# EAGLE board 27CXXXDouble (EAGLE 6.6.0)
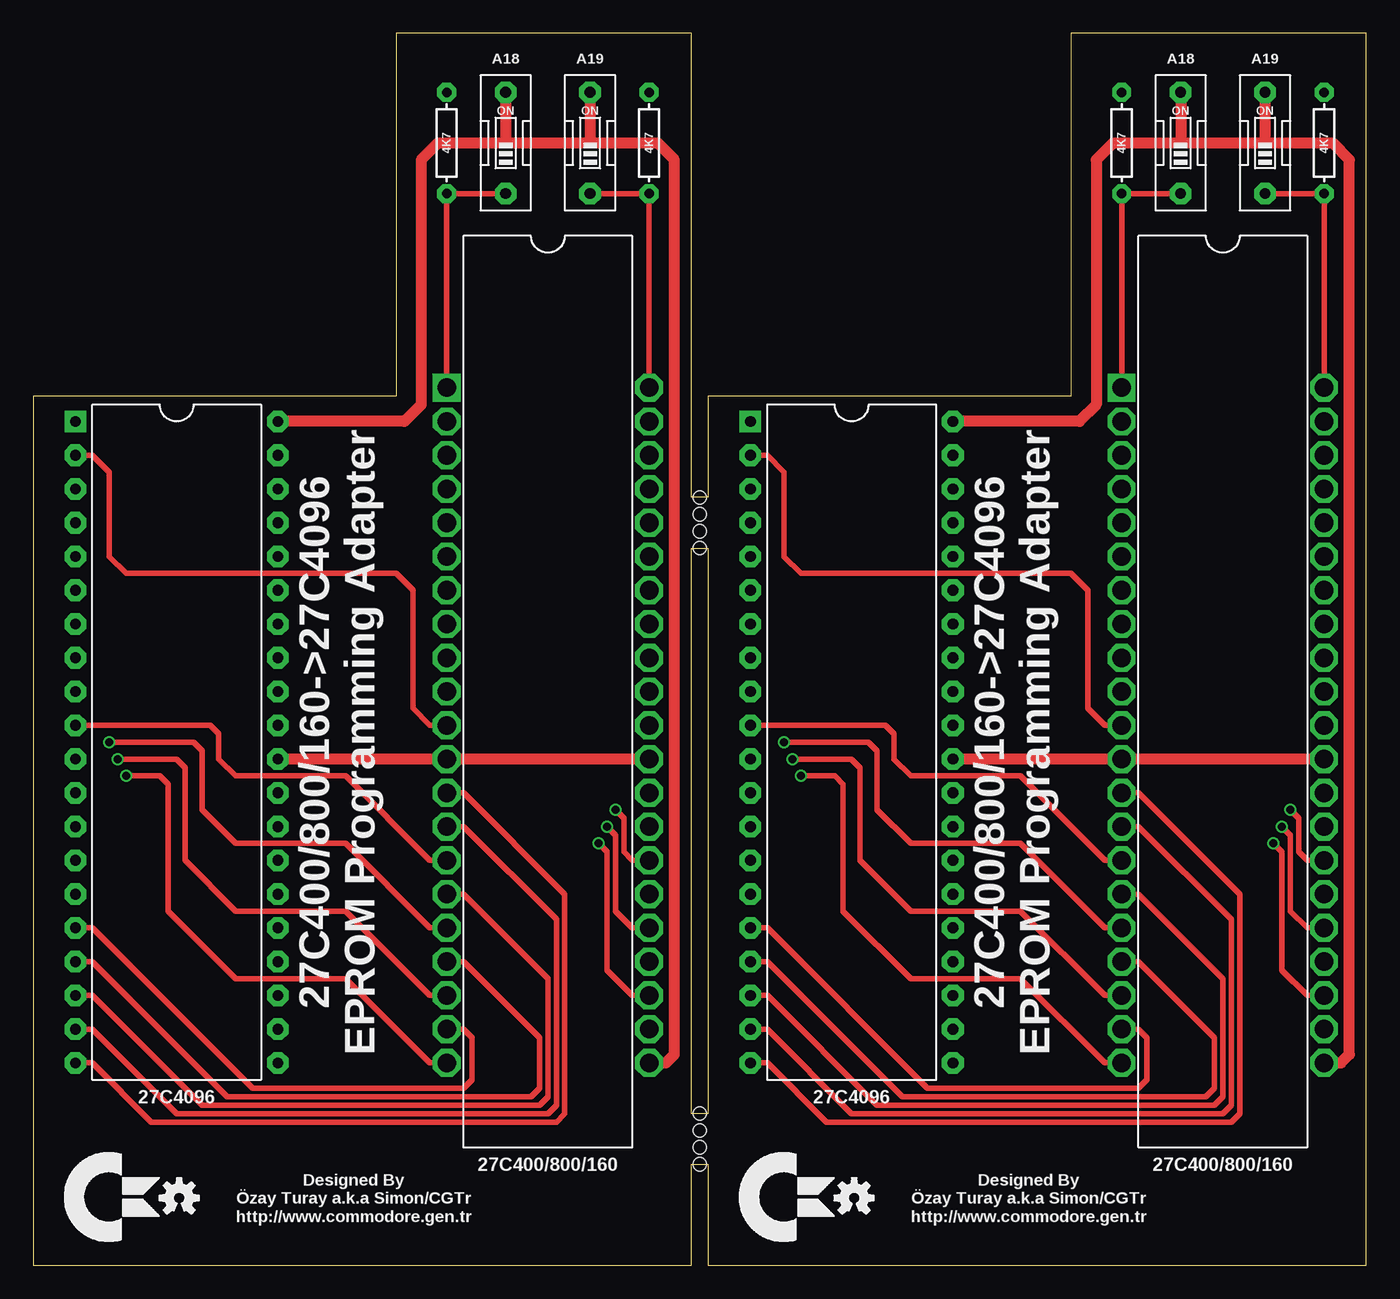
[diagram p0: board, top side]
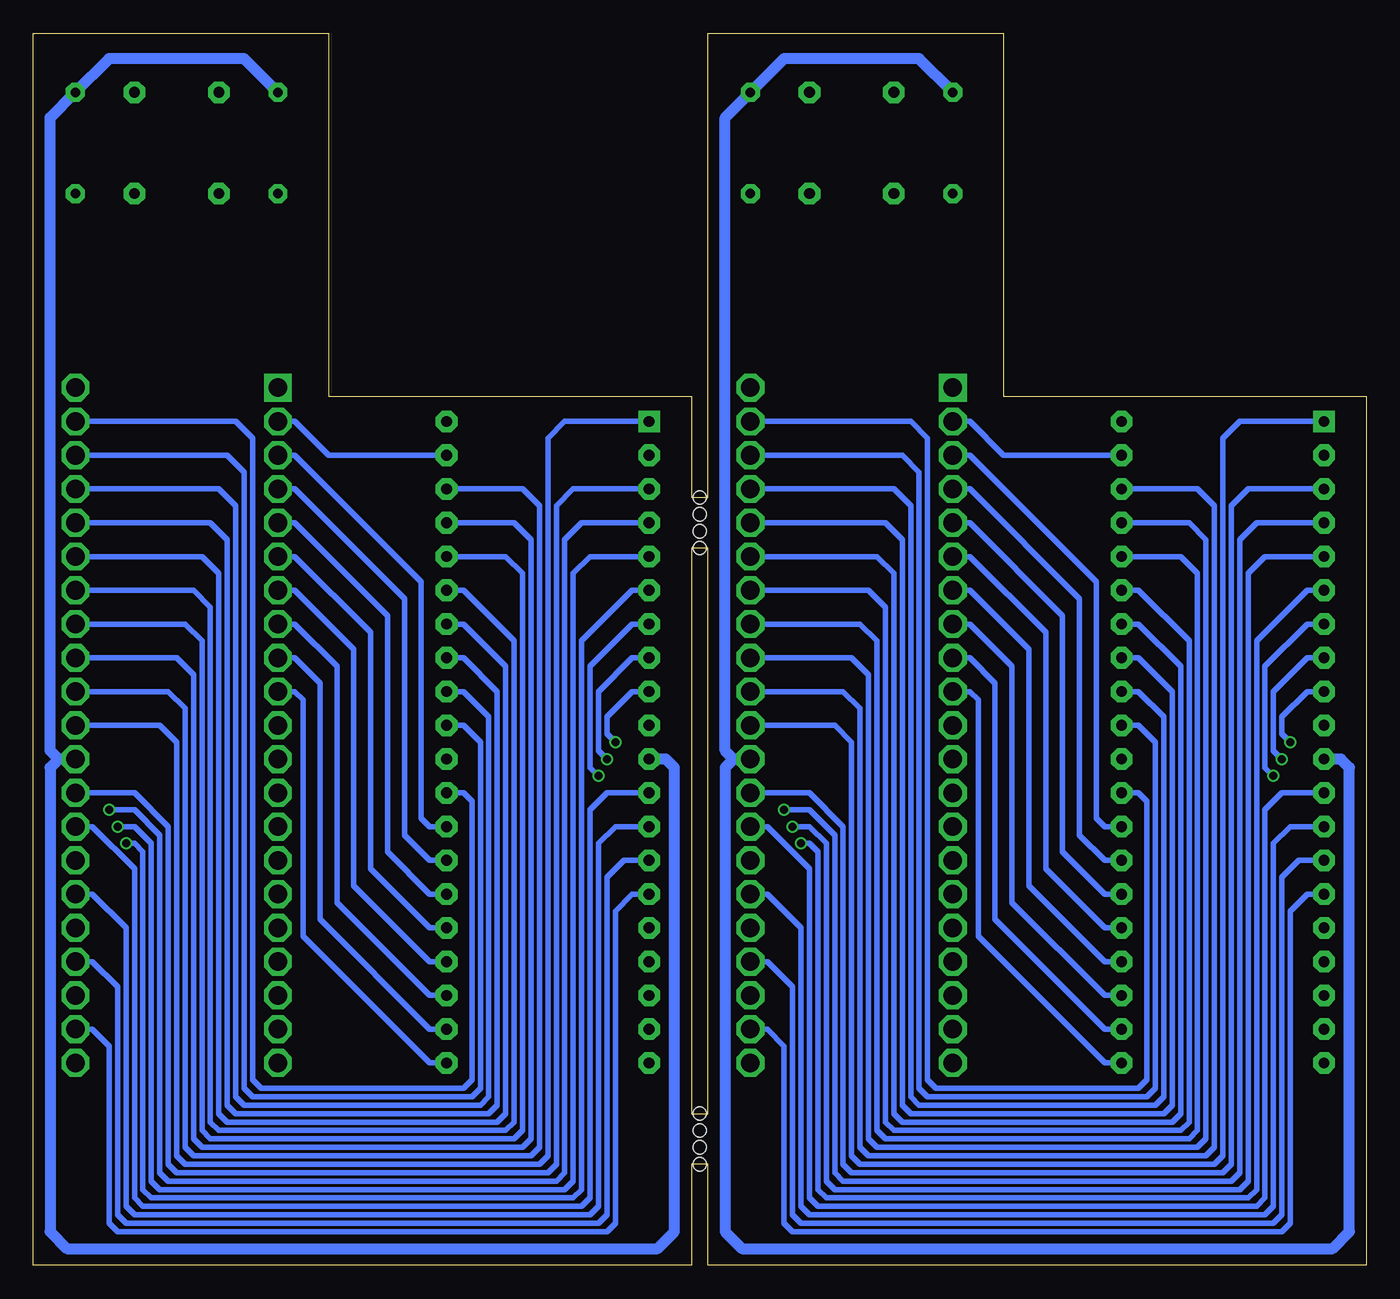
[diagram p1: board, bottom side, seen from below]

Size 100.33 x 92.71 mm. Coordinates in mm from the lower left corner, seen from the top.
Outline: 0,0 49.53,0 49.53,7.62 50.8,7.62 50.8,0 100.33,0 100.33,92.71 78.11,92.71 78.11,65.41 50.8,65.41 50.8,57.78 49.53,57.78 49.53,92.71 27.3,92.71 27.3,65.41 0,65.41 0,0
Outline: 50.8,11.43 49.53,11.43 49.53,53.98 50.8,53.98 50.8,11.43
Copper layers (1*16): Top 0.035mm / dielectric 1.5mm / Bottom 0.035mm
Design rules "DirtyPCBs": minimum track width 5mil, minimum drill 12mil, track to track 5mil, track to pad 5mil, pad to pad 5mil, via to via 5mil, smd to smd 0mil, copper to edge 10mil, drill to drill 10mil, minimum pad ring 10mil, minimum via ring 6mil, stop-mask expansion 2mil, vias tented up to drill 25mil, thermal gap 10mil
Holes 1.02 mm at 50.16,57.78 50.16,56.52 50.16,55.24 50.16,53.98 50.16,11.43 50.16,10.16 50.16,8.89 50.16,7.62

## Footprints (pad centres in the part's own frame; a part is rotated, then mirrored left to right if it is on the bottom)
DIP40W = drill 0.813 pad 1.626 square: 1 -24.13,-7.62 | drill 0.813 pad 1.626 octagon: 2 -21.59,-7.62; 3 -19.05,-7.62; 4 -16.51,-7.62; 5 -13.97,-7.62; 6 -11.43,-7.62; 7 -8.89,-7.62; 8 -6.35,-7.62; 9 -3.81,-7.62; 10 -1.27,-7.62; 11 1.27,-7.62; 12 3.81,-7.62; 13 6.35,-7.62; 14 8.89,-7.62; 15 11.43,-7.62; 16 13.97,-7.62; 17 16.51,-7.62; 18 19.05,-7.62; 19 21.59,-7.62; 20 24.13,-7.62; 21 24.13,7.62; 22 21.59,7.62; 23 19.05,7.62; 24 16.51,7.62; 25 13.97,7.62; 26 11.43,7.62; 27 8.89,7.62; 28 6.35,7.62; 29 3.81,7.62; 30 1.27,7.62; 31 -1.27,7.62; 32 -3.81,7.62; 33 -6.35,7.62; 34 -8.89,7.62; 35 -11.43,7.62; 36 -13.97,7.62; 37 -16.51,7.62; 38 -19.05,7.62; 39 -21.59,7.62; 40 -24.13,7.62
ZIF42 = drill 1.397 pad 2.032 square: 1 -25.4,-7.62 | drill 1.397 pad 2.032 octagon: 2 -22.86,-7.62; 3 -20.32,-7.62; 4 -17.78,-7.62; 5 -15.24,-7.62; 6 -12.7,-7.62; 7 -10.16,-7.62; 8 -7.62,-7.62; 9 -5.08,-7.62; 10 -2.54,-7.62; 11 0,-7.62; 12 2.54,-7.62; 13 5.08,-7.62; 14 7.62,-7.62; 15 10.16,-7.62; 16 12.7,-7.62; 17 15.24,-7.62; 18 17.78,-7.62; 19 20.32,-7.62; 20 22.86,-7.62; 21 25.4,-7.62; 22 25.4,7.62; 23 22.86,7.62; 24 20.32,7.62; 25 17.78,7.62; 26 15.24,7.62; 27 12.7,7.62; 28 10.16,7.62; 29 7.62,7.62; 30 5.08,7.62; 31 2.54,7.62; 32 0,7.62; 33 -2.54,7.62; 34 -5.08,7.62; 35 -7.62,7.62; 36 -10.16,7.62; 37 -12.7,7.62; 38 -15.24,7.62; 39 -17.78,7.62; 40 -20.32,7.62; 41 -22.86,7.62; 42 -25.4,7.62
RESISTOR_0.3 = drill 0.711 pad 1.422 octagon: 1 -3.81,0; 2 3.81,0
SWITCH_DIP_01 = drill 0.813 pad 1.626 octagon: 1 0,-3.81; 2 0,3.81

## Placement (x,y rotation side)
IC1  27C4096  [DIP40W]  10.79,39.37 270 top
IC2  27C400/800/160  [ZIF42]  38.73,40.64 270 top
IC3  27C4096  [DIP40W]  61.59,39.37 270 top
IC4  27C400/800/160  [ZIF42]  89.53,40.64 270 top
LOGO1  OSHW_LOGO_SMALL  [OSHW_LOGO_SMALL]  10.99,5.08 0 top
LOGO2  OSHW_LOGO_SMALL  [OSHW_LOGO_SMALL]  61.79,5.08 0 top
R1  4K7  [RESISTOR_0.3]  31.11,84.45 90 top
R2  4K7  [RESISTOR_0.3]  46.35,84.45 90 top
R3  4K7  [RESISTOR_0.3]  81.92,84.45 90 top
R4  4K7  [RESISTOR_0.3]  97.16,84.45 90 top
SW1  A18  [SWITCH_DIP_01]  35.56,84.45 0 top
SW2  A19  [SWITCH_DIP_01]  41.91,84.45 0 top
SW3  A18  [SWITCH_DIP_01]  86.36,84.45 0 top
SW4  A19  [SWITCH_DIP_01]  92.71,84.45 0 top

## Library data of the parts
IC1-IC4 = sj_ic
LOGO1 LOGO2 R1-R4 SW1-SW4 = sj_standart

## Nets
!CE: IC1.2 IC2.11
!CE1: IC3.2 IC4.11
!OE: IC1.20 IC2.13
!OE1: IC3.20 IC4.13
A0: IC1.21 IC2.10
A1: IC1.22 IC2.9
A2: IC1.23 IC2.8
A3: IC1.24 IC2.7
A4: IC1.25 IC2.6
A5: IC1.26 IC2.5
A6: IC1.27 IC2.4
A7: IC1.28 IC2.3
A8: IC1.29 IC2.41
A9: IC1.31 IC2.40
A10: IC1.32 IC2.39
A11: IC1.33 IC2.38
A12: IC1.34 IC2.37
A13: IC1.35 IC2.36
A14: IC1.36 IC2.35
A15: IC1.37 IC2.34
A16: IC1.38 IC2.33
A17: IC1.39 IC2.2
A18: IC2.1 R1.1 SW1.1
A19: IC2.42 R2.1 SW2.1
A20: IC3.21 IC4.10
A21: IC3.22 IC4.9
A22: IC3.23 IC4.8
A23: IC3.24 IC4.7
A24: IC3.25 IC4.6
A25: IC3.26 IC4.5
A26: IC3.27 IC4.4
A27: IC3.28 IC4.3
A28: IC3.29 IC4.41
A29: IC3.31 IC4.40
A30: IC3.32 IC4.39
A31: IC3.36 IC4.35
A32: IC3.33 IC4.38
A33: IC3.34 IC4.37
A34: IC3.37 IC4.34
A35: IC3.35 IC4.36
A36: IC3.38 IC4.33
A37: IC3.39 IC4.2
A38: IC4.1 R3.1 SW3.1
A39: IC4.42 R4.1 SW4.1
GND: IC1.11 IC1.30 IC2.12 IC2.31 R1.2 R2.2
GND1: IC3.11 IC3.30 IC4.12 IC4.31 R3.2 R4.2
Q0: IC1.19 IC2.14
Q1: IC1.18 IC2.16
Q2: IC1.17 IC2.18
Q3: IC1.16 IC2.20
Q4: IC1.15 IC2.23
Q5: IC1.14 IC2.25
Q6: IC1.13 IC2.27
Q7: IC1.12 IC2.29
Q8: IC1.10 IC2.15
Q9: IC1.9 IC2.17
Q10: IC1.8 IC2.19
Q11: IC1.7 IC2.21
Q12: IC1.6 IC2.24
Q13: IC1.5 IC2.26
Q14: IC1.4 IC2.28
Q15: IC1.3 IC2.30
Q16: IC3.19 IC4.14
Q17: IC3.18 IC4.16
Q18: IC3.17 IC4.18
Q19: IC3.16 IC4.20
Q20: IC3.15 IC4.23
Q21: IC3.14 IC4.25
Q22: IC3.13 IC4.27
Q23: IC3.12 IC4.29
Q24: IC3.10 IC4.15
Q25: IC3.9 IC4.17
Q26: IC3.8 IC4.19
Q27: IC3.7 IC4.21
Q28: IC3.6 IC4.24
Q29: IC3.5 IC4.26
Q30: IC3.4 IC4.28
Q31: IC3.3 IC4.30
VCC: IC1.40 IC2.22 SW1.2 SW2.2
VCC1: IC3.40 IC4.22 SW3.2 SW4.2
VPP: IC1.1 IC2.32
VPP1: IC3.1 IC4.32

## Tracks (layer width: path | path; a pad name or v marks a point on that pad's centre or on a via)
!CE
  Top 0.406: IC1.2 4.45,60.96 5.71,59.69 5.71,53.34 6.99,52.07 27.3,52.07 28.57,50.8 28.57,41.91 29.84,40.64 IC2.11
!CE1
  Top 0.406: IC3.2 55.24,60.96 56.52,59.69 56.52,53.34 57.78,52.07 78.11,52.07 79.38,50.8 79.38,41.91 80.64,40.64 IC4.11
!OE
  Top 0.406: IC1.20 4.45,15.24 8.89,10.79 39.37,10.79 40.01,11.43 40.01,27.94 32.38,35.56 IC2.13
!OE1
  Top 0.406: IC3.20 55.24,15.24 59.69,10.79 90.17,10.79 90.81,11.43 90.81,27.94 83.19,35.56 IC4.13
A0
  Bottom 0.406: IC1.21 19.68,15.24 29.21,24.77 29.21,42.55 29.84,43.18 IC2.10
A1
  Bottom 0.406: IC1.22 19.68,17.78 27.94,26.04 27.94,43.81 29.84,45.72 IC2.9
A2
  Bottom 0.406: IC1.23 19.68,20.32 26.67,27.3 26.67,45.09 29.84,48.26 IC2.8
A3
  Bottom 0.406: IC1.24 19.68,22.86 25.4,28.57 25.4,46.35 29.84,50.8 IC2.7
A4
  Bottom 0.406: IC1.25 19.68,25.4 24.13,29.84 24.13,47.62 29.84,53.34 IC2.6
A5
  Bottom 0.406: IC1.26 19.68,27.94 22.86,31.11 22.86,48.9 29.84,55.88 IC2.5
A6
  Bottom 0.406: IC1.27 19.68,30.48 21.59,32.38 21.59,50.16 29.84,58.42 IC2.4
A7
  Bottom 0.406: IC1.28 19.68,33.02 20.32,33.66 20.32,51.44 29.84,60.96 IC2.3
A8
  Bottom 0.406: IC1.29 17.14,35.56 16.51,34.92 16.51,13.97 17.14,13.34 32.38,13.34 33.02,13.97 33.02,62.23 34.29,63.5 IC2.41
A9
  Bottom 0.406: IC1.31 17.14,40.64 15.88,39.37 15.88,13.34 16.51,12.7 33.02,12.7 33.66,13.34 33.66,59.69 34.92,60.96 IC2.40
A10
  Bottom 0.406: IC1.32 17.14,43.18 15.24,41.27 15.24,12.7 15.88,12.06 33.66,12.06 34.29,12.7 34.29,57.15 35.56,58.42 IC2.39
A11
  Bottom 0.406: IC1.33 17.14,45.72 14.61,43.18 14.61,12.06 15.24,11.43 34.29,11.43 34.92,12.06 34.92,54.61 36.2,55.88 IC2.38
A12
  Bottom 0.406: IC1.34 17.14,48.26 13.97,45.09 13.97,11.43 14.61,10.79 34.92,10.79 35.56,11.43 35.56,52.07 36.83,53.34 IC2.37
A13
  Bottom 0.406: IC1.35 17.14,50.8 13.34,46.99 13.34,10.79 13.97,10.16 35.56,10.16 36.2,10.79 36.2,49.53 37.47,50.8 IC2.36
A14
  Bottom 0.406: IC1.36 13.97,53.34 12.7,52.07 12.7,10.16 13.34,9.53 36.2,9.53 36.83,10.16 36.83,46.99 38.1,48.26 IC2.35
A15
  Bottom 0.406: IC1.37 13.34,55.88 12.06,54.61 12.06,9.53 12.7,8.89 36.83,8.89 37.47,9.53 37.47,44.45 38.73,45.72 IC2.34
A16
  Bottom 0.406: IC1.38 12.7,58.42 11.43,57.15 11.43,8.89 12.06,8.26 37.47,8.26 38.1,8.89 38.1,41.91 39.37,43.18 IC2.33
A17
  Bottom 0.406: IC1.39 27.3,60.96 29.84,63.5 IC2.2
A18
  Top 0.406: SW1.1 R1.1 IC2.1
A19
  Top 0.406: SW2.1 R2.1 IC2.42
A20
  Bottom 0.406: IC3.21 70.48,15.24 80.01,24.77 80.01,42.55 80.64,43.18 IC4.10
A21
  Bottom 0.406: IC3.22 70.48,17.78 78.74,26.04 78.74,43.81 80.64,45.72 IC4.9
A22
  Bottom 0.406: IC3.23 70.48,20.32 77.47,27.3 77.47,45.09 80.64,48.26 IC4.8
A23
  Bottom 0.406: IC3.24 70.48,22.86 76.2,28.57 76.2,46.35 80.64,50.8 IC4.7
A24
  Bottom 0.406: IC3.25 70.48,25.4 74.93,29.84 74.93,47.62 80.64,53.34 IC4.6
A25
  Bottom 0.406: IC3.26 70.48,27.94 73.66,31.11 73.66,48.9 80.64,55.88 IC4.5
A26
  Bottom 0.406: IC3.27 70.48,30.48 72.39,32.38 72.39,50.16 80.64,58.42 IC4.4
A27
  Bottom 0.406: IC3.28 70.48,33.02 71.12,33.66 71.12,51.44 80.64,60.96 IC4.3
A28
  Bottom 0.406: IC3.29 67.94,35.56 67.31,34.92 67.31,13.97 67.94,13.34 83.19,13.34 83.82,13.97 83.82,62.23 85.09,63.5 IC4.41
A29
  Bottom 0.406: IC3.31 67.94,40.64 66.67,39.37 66.67,13.34 67.31,12.7 83.82,12.7 84.45,13.34 84.45,59.69 85.72,60.96 IC4.40
A30
  Bottom 0.406: IC3.32 67.94,43.18 66.04,41.27 66.04,12.7 66.67,12.06 84.45,12.06 85.09,12.7 85.09,57.15 86.36,58.42 IC4.39
A31
  Bottom 0.406: IC3.36 64.77,53.34 63.5,52.07 63.5,10.16 64.14,9.53 87,9.53 87.63,10.16 87.63,46.99 88.9,48.26 IC4.35
A32
  Bottom 0.406: IC3.33 67.94,45.72 65.41,43.18 65.41,12.06 66.04,11.43 85.09,11.43 85.72,12.06 85.72,54.61 87,55.88 IC4.38
A33
  Bottom 0.406: IC3.34 67.94,48.26 64.77,45.09 64.77,11.43 65.41,10.79 85.72,10.79 86.36,11.43 86.36,52.07 87.63,53.34 IC4.37
A34
  Bottom 0.406: IC3.37 64.14,55.88 62.87,54.61 62.87,9.53 63.5,8.89 87.63,8.89 88.27,9.53 88.27,44.45 89.53,45.72 IC4.34
A35
  Bottom 0.406: IC3.35 67.94,50.8 64.14,46.99 64.14,10.79 64.77,10.16 86.36,10.16 87,10.79 87,49.53 88.27,50.8 IC4.36
A36
  Bottom 0.406: IC3.38 63.5,58.42 62.23,57.15 62.23,8.89 62.87,8.26 88.27,8.26 88.9,8.89 88.9,41.91 90.17,43.18 IC4.33
A37
  Bottom 0.406: IC3.39 78.11,60.96 80.64,63.5 IC4.2
A38
  Top 0.406: SW3.1 R3.1 IC4.1
A39
  Top 0.406: SW4.1 R4.1 IC4.42
GND
  Top 0.813: IC2.31 IC2.12 IC1.30
  Bottom 0.813: 47.62,38.1 48.26,38.73 48.26,86.36 R2.2 43.81,90.81 33.66,90.81 R1.2 | IC2.31 47.62,38.1 | 47.62,38.1 48.26,37.47 48.26,2.54 46.99,1.27 2.54,1.27 1.27,2.54 1.27,37.47 1.91,38.1 IC1.11
GND1
  Top 0.813: IC4.31 IC4.12 IC3.30
  Bottom 0.813: 98.42,38.1 99.06,38.73 99.06,86.36 R4.2 94.61,90.81 84.45,90.81 R3.2 | IC4.31 98.42,38.1 | 98.42,38.1 99.06,37.47 99.06,2.54 97.79,1.27 53.34,1.27 52.07,2.54 52.07,37.47 52.7,38.1 IC3.11
Q0
  Top 0.406: IC1.19 4.45,17.78 10.79,11.43 38.73,11.43 39.37,12.06 39.37,26.04 32.38,33.02 IC2.14
Q1
  Top 0.406: IC1.18 4.45,20.32 12.7,12.06 38.1,12.06 38.73,12.7 38.73,21.59 32.38,27.94 IC2.16
Q2
  Top 0.406: IC1.17 4.45,22.86 14.61,12.7 37.47,12.7 38.1,13.34 38.1,17.14 32.38,22.86 IC2.18
Q3
  Top 0.406: IC1.16 4.45,25.4 16.51,13.34 32.38,13.34 33.02,13.97 33.02,17.14 32.38,17.78 IC2.20
Q4
  Bottom 0.406: IC1.15 4.45,27.94 5.71,26.67 5.71,3.17 6.35,2.54 43.18,2.54 43.81,3.17 43.81,16.51 45.09,17.78 IC2.23
Q5
  Bottom 0.406: IC1.14 5.08,30.48 6.35,29.21 6.35,3.81 6.99,3.17 42.55,3.17 43.18,3.81 43.18,20.95 45.09,22.86 IC2.25
Q6
  Bottom 0.406: IC1.13 5.71,33.02 6.99,31.75 6.99,4.45 7.62,3.81 41.91,3.81 42.55,4.45 42.55,25.4 45.09,27.94 IC2.27
Q7
  Bottom 0.406: IC1.12 6.35,35.56 7.62,34.29 7.62,5.08 8.26,4.45 41.27,4.45 41.91,5.08 41.91,29.84 45.09,33.02 IC2.29
Q8
  Top 0.406: IC2.15 29.84,30.48 23.5,36.83 15.24,36.83 13.97,38.1 13.97,40.01 13.34,40.64 IC1.10
Q9  (via drill 0.6)
  Top 0.406: v5.71,39.37 12.06,39.37 12.7,38.73 12.7,34.29 15.24,31.75 23.5,31.75 29.84,25.4 IC2.17
  Bottom 0.406: IC1.9 4.45,43.18 6.35,41.27 6.35,40.01 v5.71,39.37
Q10  (via drill 0.6)
  Top 0.406: v6.35,38.1 10.79,38.1 11.43,37.47 11.43,30.48 15.24,26.67 23.5,26.67 29.84,20.32 IC2.19
  Bottom 0.406: IC1.8 4.45,45.72 6.99,43.18 6.99,38.73 v6.35,38.1
Q11  (via drill 0.6)
  Top 0.406: v6.99,36.83 9.53,36.83 10.16,36.2 10.16,26.67 15.24,21.59 23.5,21.59 29.84,15.24 IC2.21
  Bottom 0.406: IC1.7 4.45,48.26 7.62,45.09 7.62,37.47 v6.99,36.83
Q12  (via drill 0.6)
  Top 0.406: v42.55,31.75 43.18,31.11 43.18,22.23 45.09,20.32 IC2.24
  Bottom 0.406: IC1.6 4.45,50.8 8.26,46.99 8.26,5.71 8.89,5.08 40.64,5.08 41.27,5.71 41.27,31.11 41.91,31.75 v42.55,31.75
Q13  (via drill 0.6)
  Top 0.406: v43.18,33.02 43.81,32.38 43.81,26.67 45.09,25.4 IC2.26
  Bottom 0.406: IC1.5 7.62,53.34 8.89,52.07 8.89,6.35 9.53,5.71 40.01,5.71 40.64,6.35 40.64,31.75 41.91,33.02 v43.18,33.02
Q14  (via drill 0.6)
  Top 0.406: v43.81,34.29 44.45,33.66 44.45,31.11 45.09,30.48 IC2.28
  Bottom 0.406: IC1.4 8.26,55.88 9.53,54.61 9.53,6.99 10.16,6.35 39.37,6.35 40.01,6.99 40.01,32.38 41.91,34.29 v43.81,34.29
Q15
  Bottom 0.406: IC1.3 8.89,58.42 10.16,57.15 10.16,7.62 10.79,6.99 38.73,6.99 39.37,7.62 39.37,33.02 41.91,35.56 IC2.30
Q16
  Top 0.406: IC3.19 55.24,17.78 61.59,11.43 89.53,11.43 90.17,12.06 90.17,26.04 83.19,33.02 IC4.14
Q17
  Top 0.406: IC3.18 55.24,20.32 63.5,12.06 88.9,12.06 89.53,12.7 89.53,21.59 83.19,27.94 IC4.16
Q18
  Top 0.406: IC3.17 55.24,22.86 65.41,12.7 88.27,12.7 88.9,13.34 88.9,17.14 83.19,22.86 IC4.18
Q19
  Top 0.406: IC3.16 55.24,25.4 67.31,13.34 83.19,13.34 83.82,13.97 83.82,17.14 83.19,17.78 IC4.20
Q20
  Bottom 0.406: IC3.15 55.24,27.94 56.52,26.67 56.52,3.17 57.15,2.54 93.98,2.54 94.61,3.17 94.61,16.51 95.89,17.78 IC4.23
Q21
  Bottom 0.406: IC3.14 55.88,30.48 57.15,29.21 57.15,3.81 57.78,3.17 93.34,3.17 93.98,3.81 93.98,20.95 95.89,22.86 IC4.25
Q22
  Bottom 0.406: IC3.13 56.52,33.02 57.78,31.75 57.78,4.45 58.42,3.81 92.71,3.81 93.34,4.45 93.34,25.4 95.89,27.94 IC4.27
Q23
  Bottom 0.406: IC3.12 57.15,35.56 58.42,34.29 58.42,5.08 59.05,4.45 92.08,4.45 92.71,5.08 92.71,29.84 95.89,33.02 IC4.29
Q24
  Top 0.406: IC4.15 80.64,30.48 74.3,36.83 66.04,36.83 64.77,38.1 64.77,40.01 64.14,40.64 IC3.10
Q25  (via drill 0.6)
  Top 0.406: v56.52,39.37 62.87,39.37 63.5,38.73 63.5,34.29 66.04,31.75 74.3,31.75 80.64,25.4 IC4.17
  Bottom 0.406: IC3.9 55.24,43.18 57.15,41.27 57.15,40.01 v56.52,39.37
Q26  (via drill 0.6)
  Top 0.406: v57.15,38.1 61.59,38.1 62.23,37.47 62.23,30.48 66.04,26.67 74.3,26.67 80.64,20.32 IC4.19
  Bottom 0.406: IC3.8 55.24,45.72 57.78,43.18 57.78,38.73 v57.15,38.1
Q27  (via drill 0.6)
  Top 0.406: v57.78,36.83 60.33,36.83 60.96,36.2 60.96,26.67 66.04,21.59 74.3,21.59 80.64,15.24 IC4.21
  Bottom 0.406: IC3.7 55.24,48.26 58.42,45.09 58.42,37.47 v57.78,36.83
Q28  (via drill 0.6)
  Top 0.406: v93.34,31.75 93.98,31.11 93.98,22.23 95.89,20.32 IC4.24
  Bottom 0.406: IC3.6 55.24,50.8 59.05,46.99 59.05,5.71 59.69,5.08 91.44,5.08 92.08,5.71 92.08,31.11 92.71,31.75 v93.34,31.75
Q29  (via drill 0.6)
  Top 0.406: v93.98,33.02 94.61,32.38 94.61,26.67 95.89,25.4 IC4.26
  Bottom 0.406: IC3.5 58.42,53.34 59.69,52.07 59.69,6.35 60.33,5.71 90.81,5.71 91.44,6.35 91.44,31.75 92.71,33.02 v93.98,33.02
Q30  (via drill 0.6)
  Top 0.406: v94.61,34.29 95.25,33.66 95.25,31.11 95.89,30.48 IC4.28
  Bottom 0.406: IC3.4 59.05,55.88 60.33,54.61 60.33,6.99 60.96,6.35 90.17,6.35 90.81,6.99 90.81,32.38 92.71,34.29 v94.61,34.29
Q31
  Bottom 0.406: IC3.3 59.69,58.42 60.96,57.15 60.96,7.62 61.59,6.99 89.53,6.99 90.17,7.62 90.17,33.02 92.71,35.56 IC4.30
VCC
  Top 0.813: IC2.22 47.62,15.24 48.26,15.88 48.26,83.19 46.99,84.45 41.91,84.45 | IC1.40 27.94,63.5 29.21,64.77 29.21,83.19 30.48,84.45 35.56,84.45 | 35.56,84.45 41.91,84.45 | SW1.2 35.56,84.45 | SW2.2 41.91,84.45
VCC1
  Top 0.813: IC4.22 98.42,15.24 99.06,15.88 99.06,83.19 97.79,84.45 92.71,84.45 | IC3.40 78.74,63.5 80.01,64.77 80.01,83.19 81.28,84.45 86.36,84.45 | 86.36,84.45 92.71,84.45 | SW3.2 86.36,84.45 | SW4.2 92.71,84.45
VPP
  Bottom 0.406: IC1.1 9.53,63.5 10.79,62.23 10.79,8.26 11.43,7.62 38.1,7.62 38.73,8.26 38.73,39.37 40.01,40.64 IC2.32
VPP1
  Bottom 0.406: IC3.1 60.33,63.5 61.59,62.23 61.59,8.26 62.23,7.62 88.9,7.62 89.53,8.26 89.53,39.37 90.81,40.64 IC4.32

## Text on the board
tPlace: 27C400/800/160->27C4096 / EPROM Programming Adapter | 27C400/800/160->27C4096 / EPROM Programming Adapter | Designed By / Özay Turay a.k.a Simon/CGTr / http://www.commodore.gen.tr | Designed By / Özay Turay a.k.a Simon/CGTr / http://www.commodore.gen.tr